# EAGLE board osi-proto_rev_0 (EAGLE 6.3)
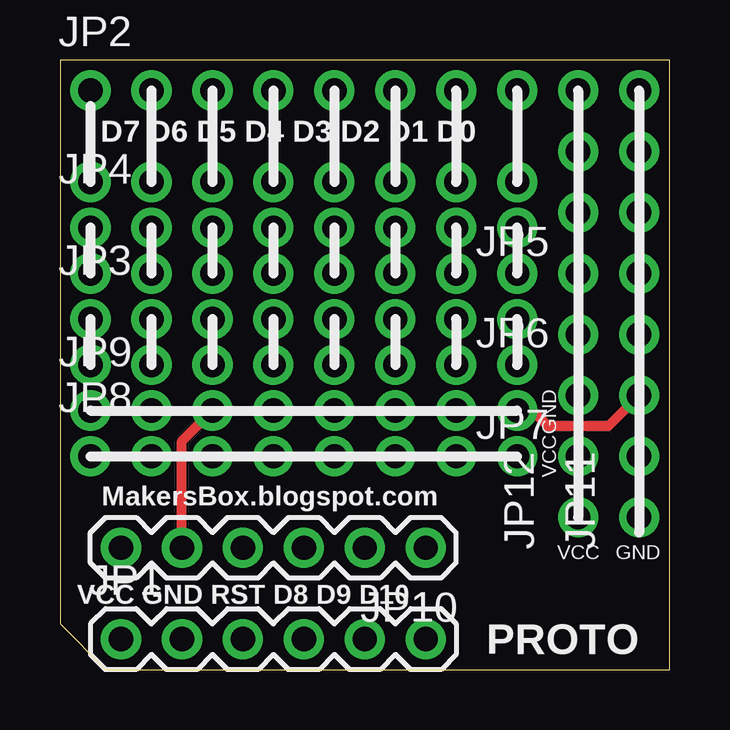
[diagram p0: board, top side]
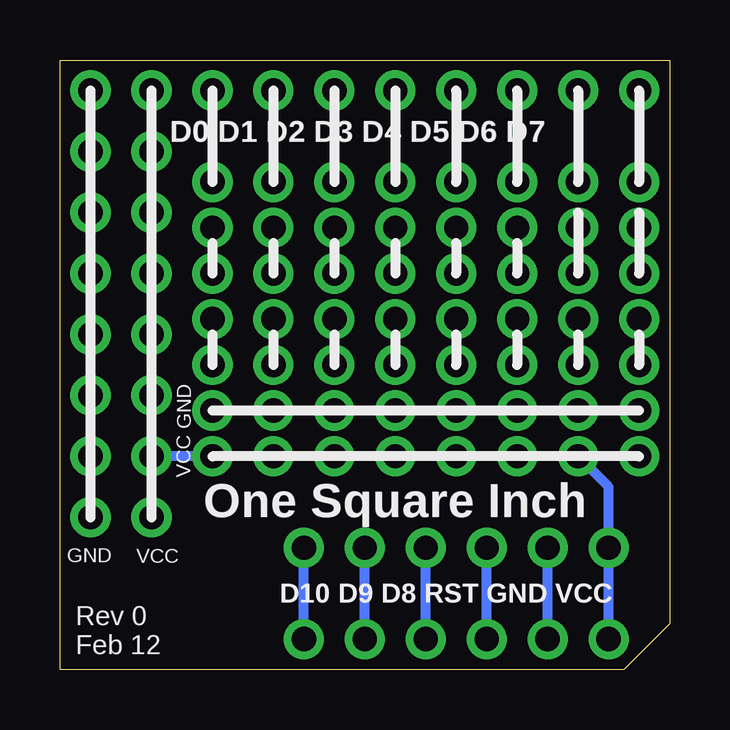
[diagram p1: board, bottom side, seen from below]

Size 25.4 x 25.4 mm. Coordinates in mm from the lower left corner, seen from the top.
Outline: 1.91,0 24.77,0 24.77,0 25.4,0 25.4,25.4 24.77,25.4 24.77,25.4 0.64,25.4 0,25.4 0,24.77 0,1.91 1.91,0
Copper layers (1*16): Top 0.035mm / dielectric 1.5mm / Bottom 0.035mm
Design rules "SparkFun": minimum track width 8mil, minimum drill 20mil, track to track 8mil, track to pad 8mil, pad to pad 8mil, via to via 8mil, smd to smd 8mil, copper to edge 10mil, drill to drill 8mil, minimum pad ring 12mil, minimum via ring 10mil, stop-mask expansion 4mil, vias tented up to drill 25mil, thermal gap 10mil

## Footprints (pad centres in the part's own frame; a part is rotated, then mirrored left to right if it is on the bottom)
1X06 = drill 1.016 pad 1.676: 1 0,0; 2 2.54,0; 3 5.08,0; 4 7.62,0; 5 10.16,0; 6 12.7,0
1X08 = drill 1.016 pad 1.676: 1 0,0; 2 2.54,0; 3 5.08,0; 4 7.62,0; 5 10.16,0; 6 12.7,0; 7 15.24,0; 8 17.78,0

## Placement (x,y rotation side)
JP1  [1X06]  2.54,1.27 0 top
JP2  [1X08]  1.27,24.13 0 top
JP3  [1X08]  1.27,14.61 0 top
JP4  [1X08]  1.27,18.41 0 top
JP5  [1X08]  19.05,20.32 180 top
JP6  [1X08]  19.05,16.51 180 top
JP7  [1X08]  19.05,12.7 180 top
JP8  [1X08]  1.27,8.89 0 top
JP9  [1X08]  1.27,10.79 0 top
JP10  [1X06]  15.24,5.08 180 top
JP11  [1X08]  24.13,6.35 90 top
JP12  [1X08]  21.59,6.35 90 top

## Library data of the parts
JP1-JP12 = SparkFun_mod

## Nets
D0: JP2.8 JP5.1
D1: JP2.7 JP5.2
D2: JP2.6 JP5.3
D3: JP2.5 JP5.4
D5: JP2.3 JP5.6
D7: JP2.1 JP5.8
GND: JP1.2 JP9.1 JP9.2 JP9.3 JP9.4 JP9.5 JP9.6 JP9.7 JP9.8 JP10.5 JP11.1 JP11.2 JP11.3 JP11.4 JP11.5 JP11.6 JP11.7 JP11.8
N$1: JP4.8 JP6.1
N$2: JP4.7 JP6.2
N$3: JP4.6 JP6.3
N$4: JP4.5 JP6.4
N$5: JP4.4 JP6.5
N$6: JP4.3 JP6.6
N$7: JP4.2 JP6.7
N$8: JP4.1 JP6.8
N$9: JP3.1 JP7.8
N$10: JP3.2 JP7.7
N$11: JP3.3 JP7.6
N$12: JP3.4 JP7.5
N$13: JP3.5 JP7.4
N$14: JP3.6 JP7.3
N$15: JP3.7 JP7.2
N$16: JP3.8 JP7.1
N$18: JP1.6 JP10.1
N$20: JP1.5 JP10.2
N$21: JP1.4 JP10.3
N$22: JP1.3 JP10.4
SCK: JP2.2 JP5.7
SDA: JP2.4 JP5.5
VCC: JP1.1 JP8.1 JP8.2 JP8.3 JP8.4 JP8.5 JP8.6 JP8.7 JP8.8 JP10.6 JP12.1 JP12.2 JP12.3 JP12.4 JP12.5 JP12.6 JP12.7 JP12.8

## Tracks (layer width: path | path; a pad name or v marks a point on that pad's centre or on a via)
D0
  Bottom 0.406: JP2.8 JP5.1
D1
  Bottom 0.406: JP2.7 JP5.2
D2
  Bottom 0.406: JP2.6 JP5.3
D3
  Bottom 0.406: JP2.5 JP5.4
D5
  Bottom 0.406: JP2.3 JP5.6
D7
  Bottom 0.406: JP2.1 JP5.8
GND
  Top 0.406: JP10.5 5.08,9.53 JP9.3 | JP9.8 19.68,10.79 20.32,10.16 22.86,10.16 JP11.3
  Bottom 0.406: JP11.8 JP11.7 JP11.6 JP11.5 JP11.4 JP11.3 JP11.2 JP11.1 | JP9.1 JP9.2 JP9.3 JP9.4 JP9.5 JP9.6 JP9.7 JP9.8 | JP1.2 JP10.5
N$1
  Bottom 0.406: JP4.8 JP6.1
N$2
  Bottom 0.406: JP4.7 JP6.2
N$3
  Bottom 0.406: JP4.6 JP6.3
N$4
  Bottom 0.406: JP4.5 JP6.4
N$5
  Bottom 0.406: JP4.4 JP6.5
N$6
  Bottom 0.406: JP4.3 JP6.6
N$7
  Bottom 0.406: JP4.2 JP6.7
N$8
  Bottom 0.406: JP4.1 JP6.8
N$9
  Bottom 0.406: JP3.1 JP7.8
N$10
  Bottom 0.406: JP3.2 JP7.7
N$11
  Bottom 0.406: JP3.3 JP7.6
N$12
  Bottom 0.406: JP3.4 JP7.5
N$13
  Bottom 0.406: JP3.5 JP7.4
N$14
  Bottom 0.406: JP3.6 JP7.3
N$15
  Bottom 0.406: JP3.7 JP7.2
N$16
  Bottom 0.406: JP3.8 JP7.1
N$18
  Bottom 0.406: JP1.6 JP10.1
N$20
  Bottom 0.406: JP1.5 JP10.2
N$21
  Bottom 0.406: JP1.4 JP10.3
N$22
  Bottom 0.406: JP1.3 JP10.4
SCK
  Bottom 0.406: JP2.2 JP5.7
SDA
  Bottom 0.406: JP2.4 JP5.5
VCC
  Bottom 0.406: JP1.1 JP10.6 2.54,7.62 JP8.2 | JP12.8 JP12.7 JP12.6 JP12.5 JP12.4 JP12.3 JP12.2 | JP12.2 JP12.1 | JP8.1 JP8.2 | JP8.2 JP8.3 JP8.4 JP8.5 JP8.6 JP8.7 JP8.8 JP12.2

## Text on the board
tPlace: D7 D6 D5 D4 D3 D2 D1 D0 | GND | VCC | MakersBox.blogspot.com | VCC | GND | VCC GND RST D8 D9 D10 | PROTO
bPlace: D0 D1 D2 D3 D4 D5 D6 D7 | GND | VCC | One Square Inch | GND | VCC | D10 D9 D8 RST GND VCC | Rev 0 / Feb 12